# Altium PCB PCB1.PcbDoc
Units mm, origin at the board's own origin, x right, y up, seen from the top; angles counter-clockwise.
Board outline 50 x 50 mm, 4 copper layers (Top Layer, Top Ground, Bottom Ground, Bottom Layer), stack 0.603 mm thick; 86 components, 67 nets, 302 pads, 139 vias.
Unrouted connection lines stored in the file: 23.
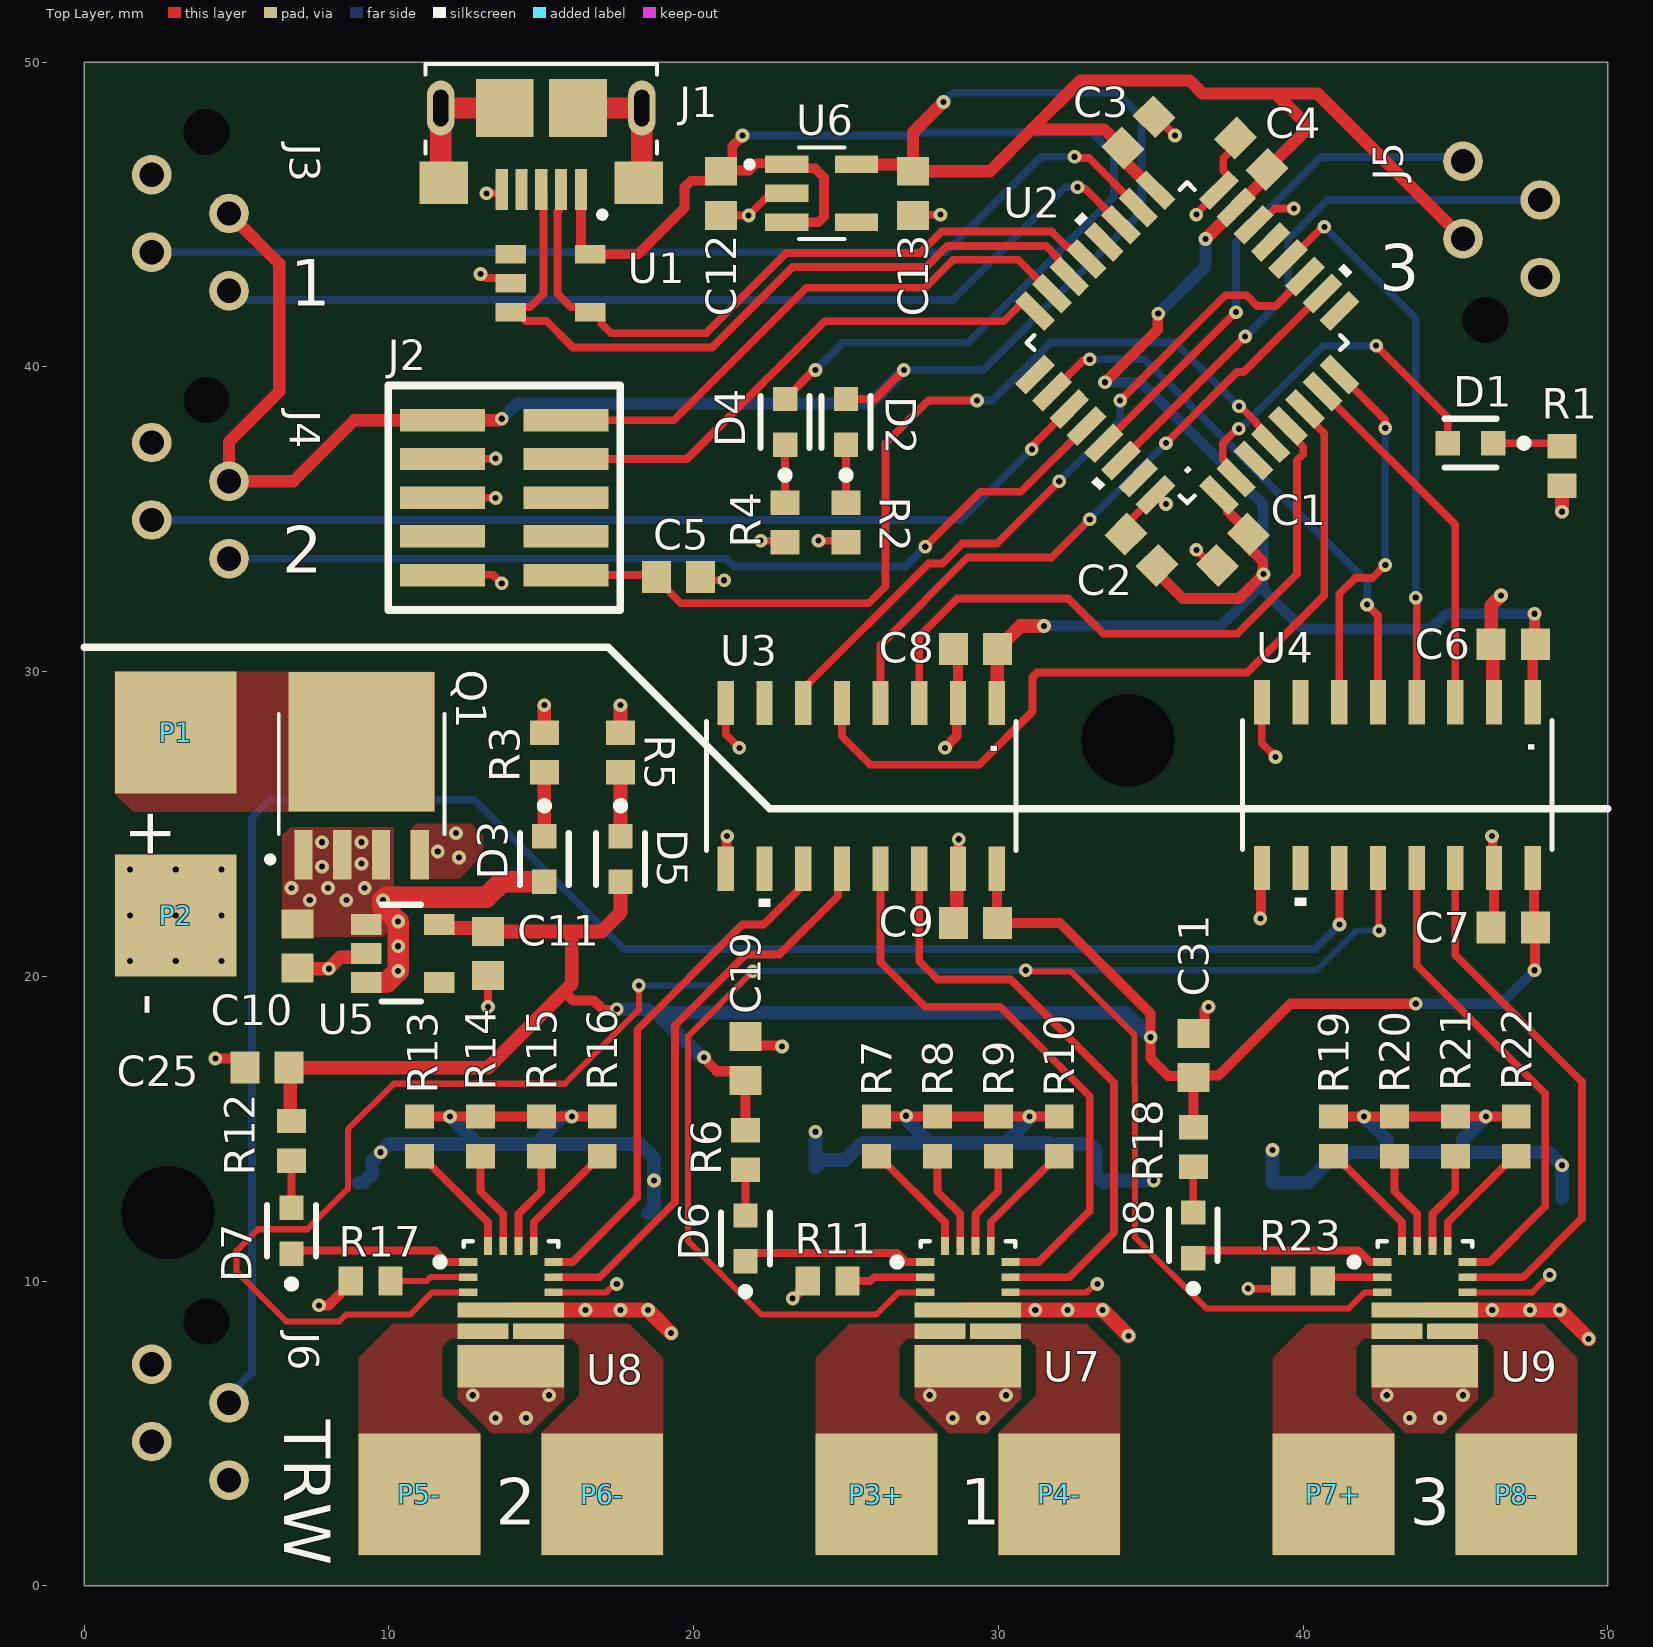
[diagram p0: Top Layer view]
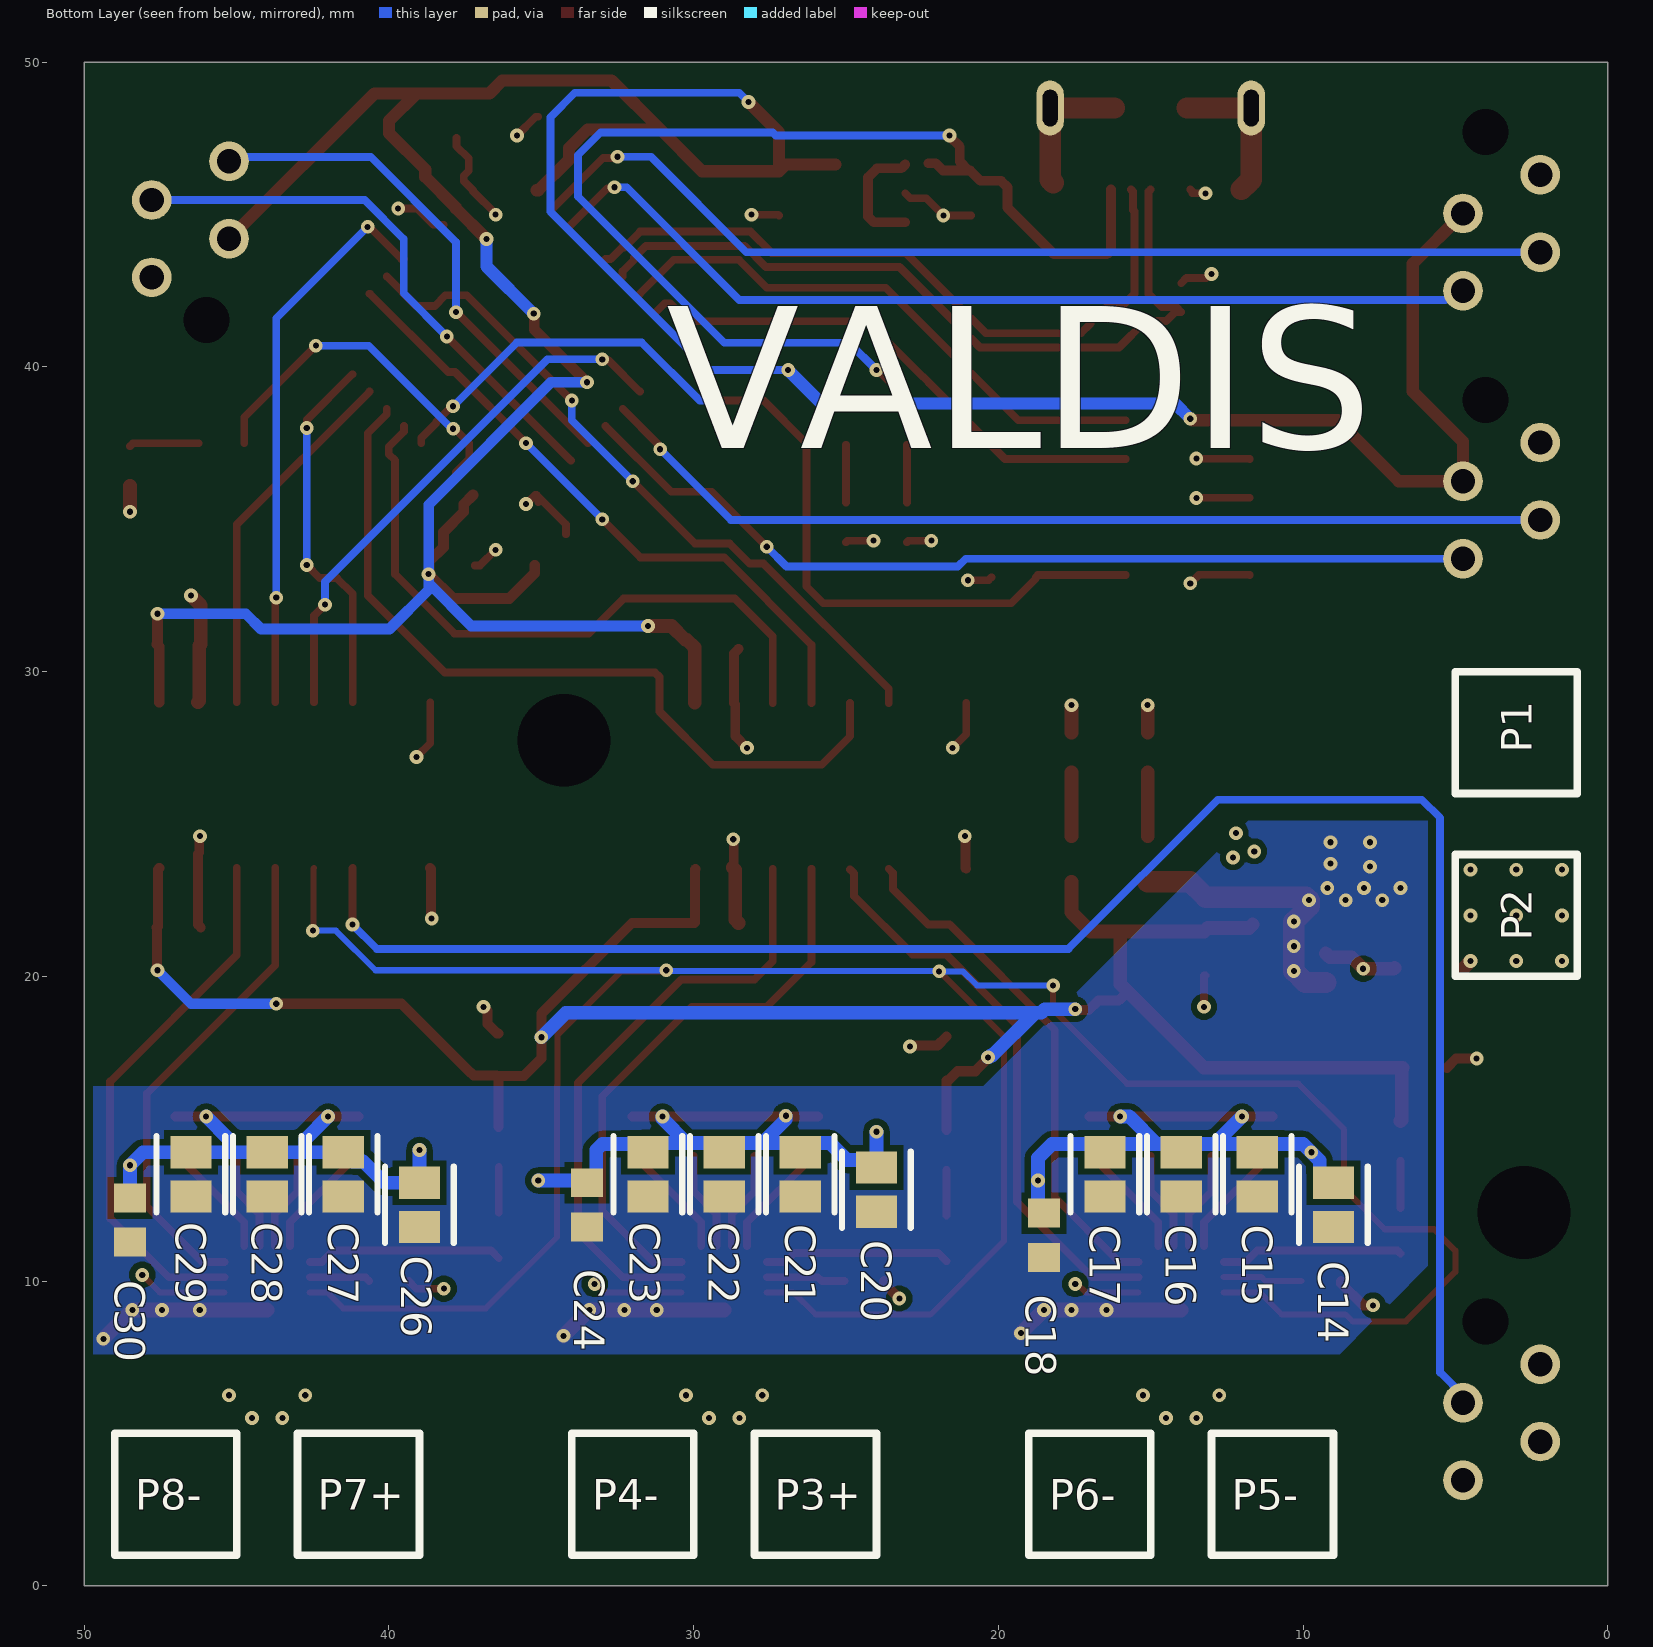
[diagram p1: Bottom Layer view, seen from below]
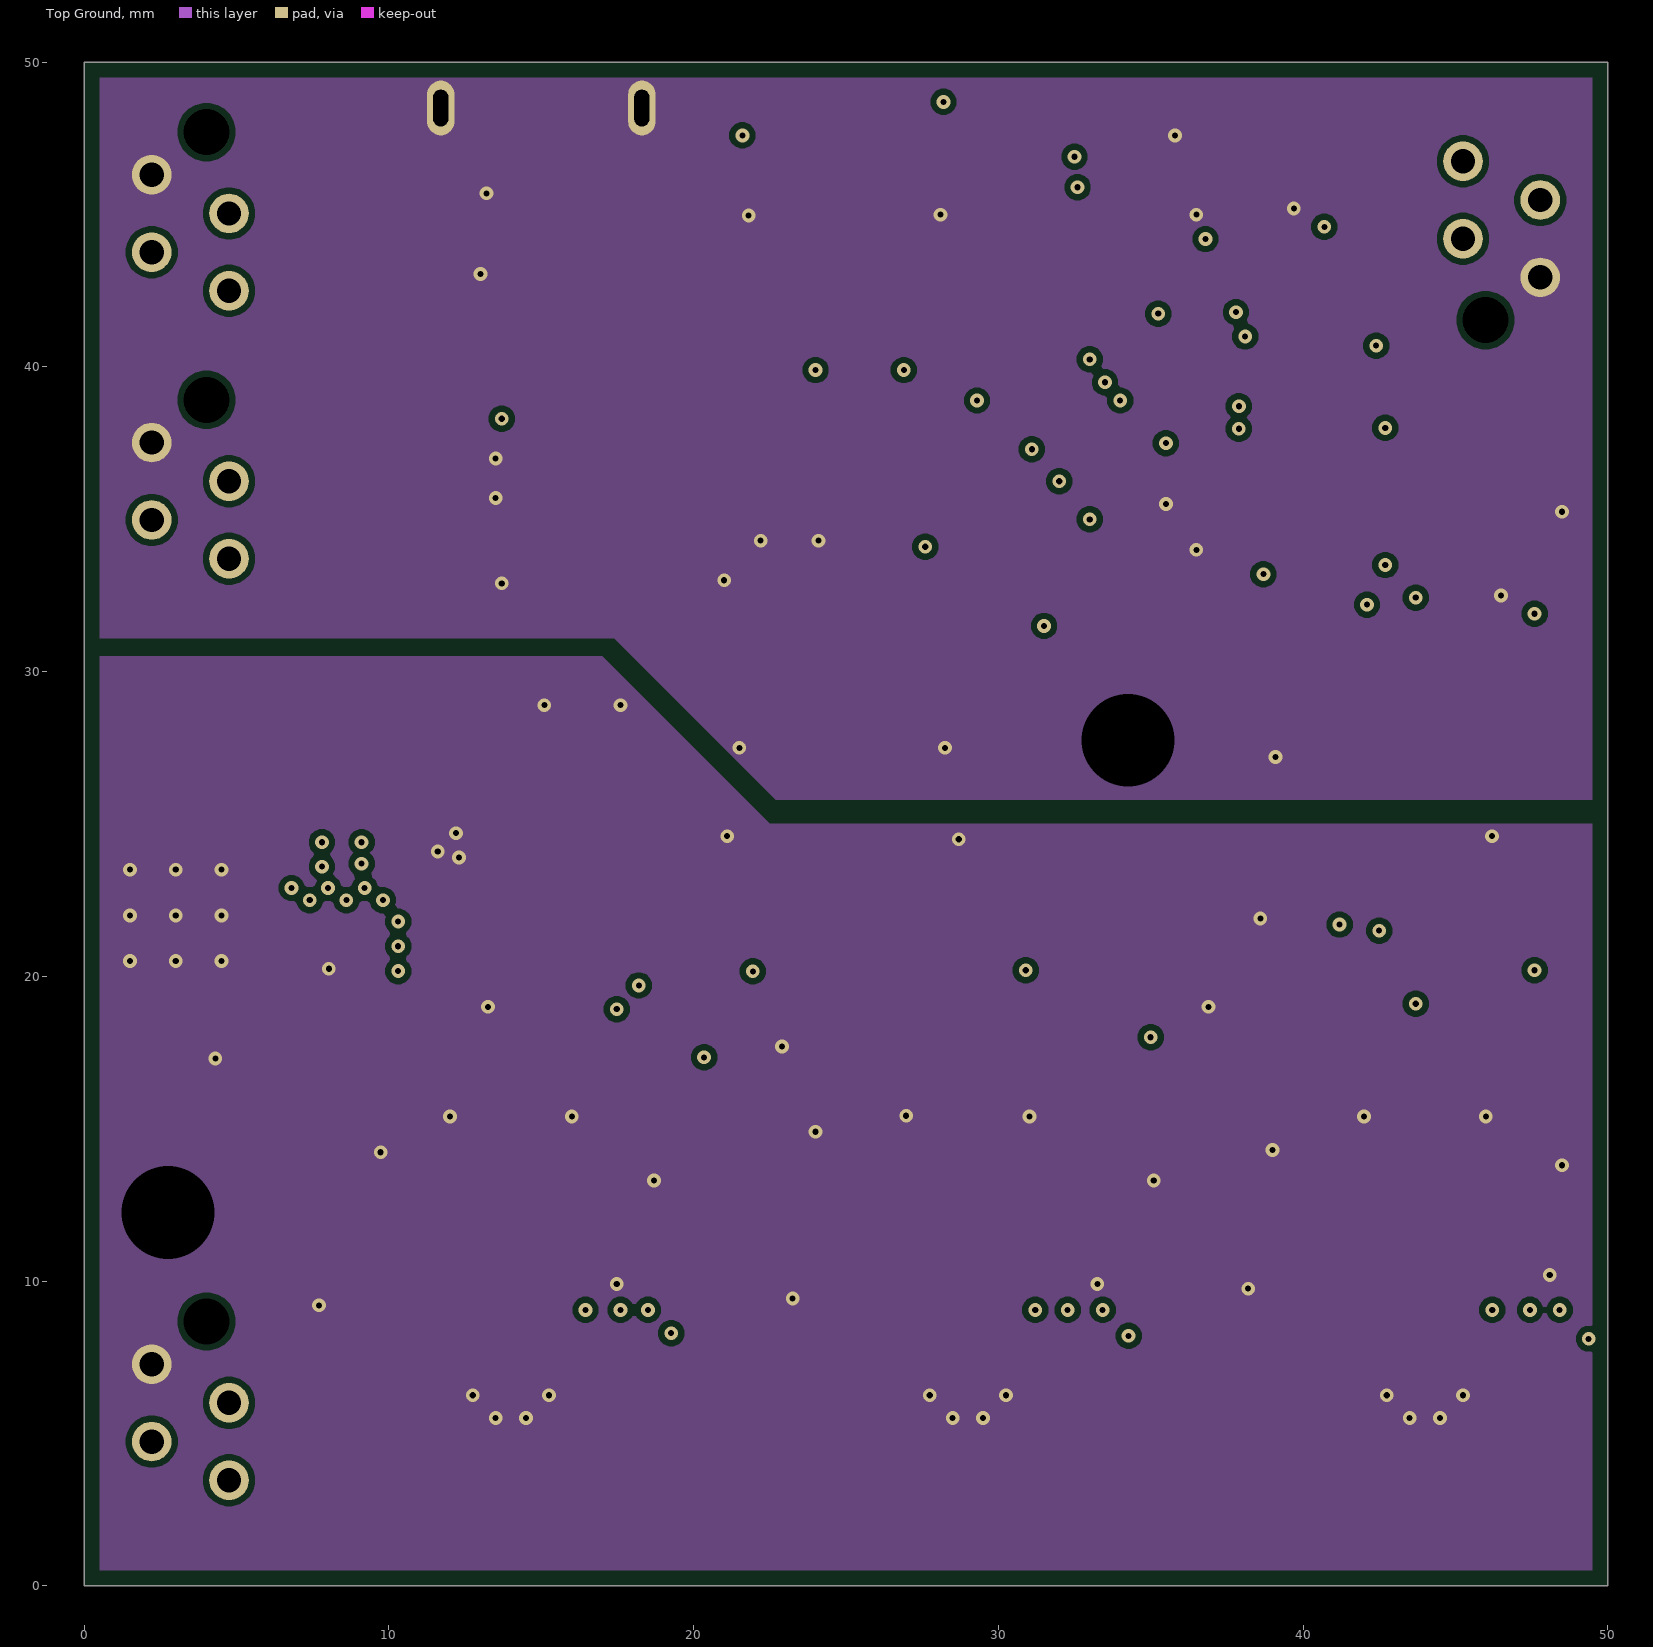
[diagram p2: Top Ground]
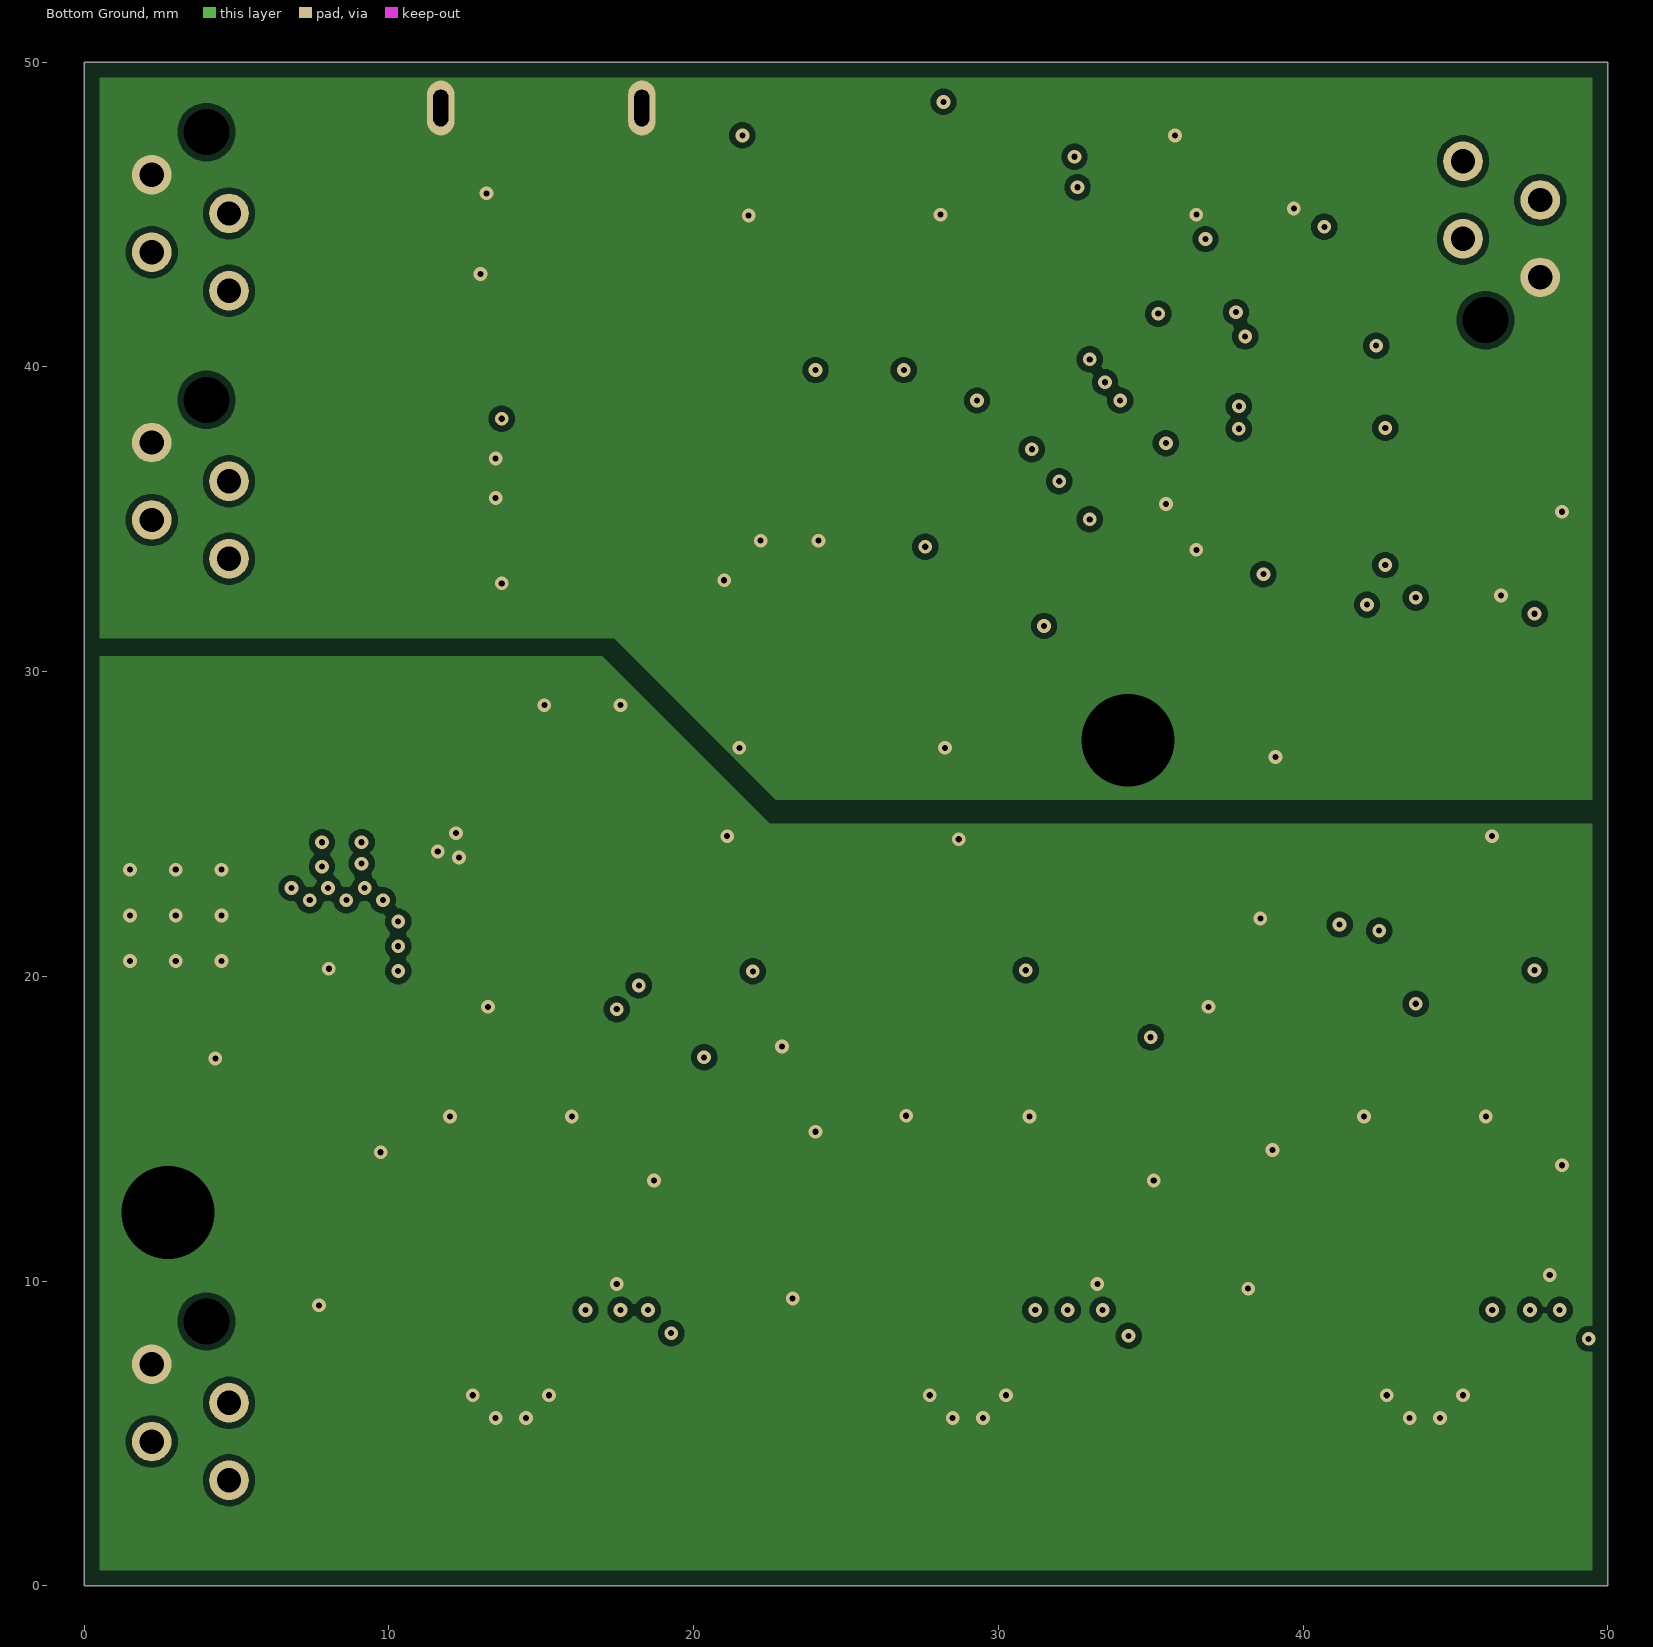
[diagram p3: Bottom Ground]
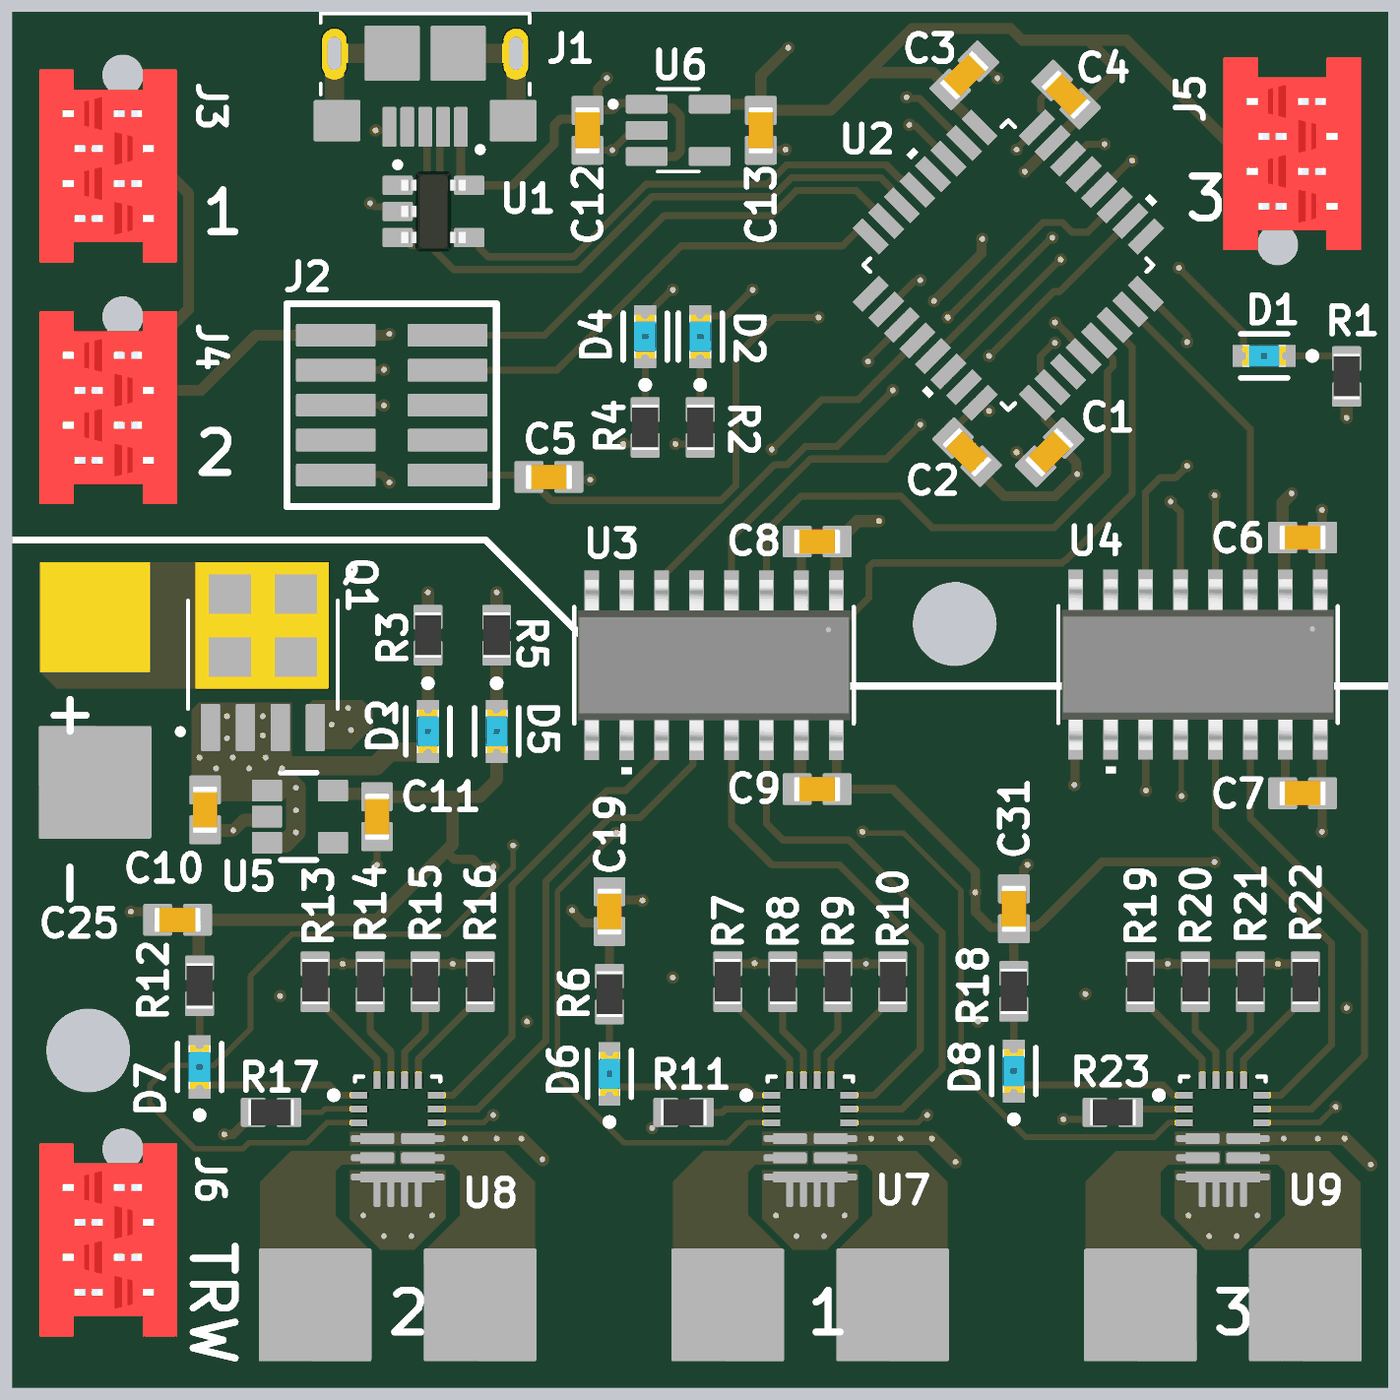
[diagram p4: 3D render of the assembled board from above, using the file's embedded part models]
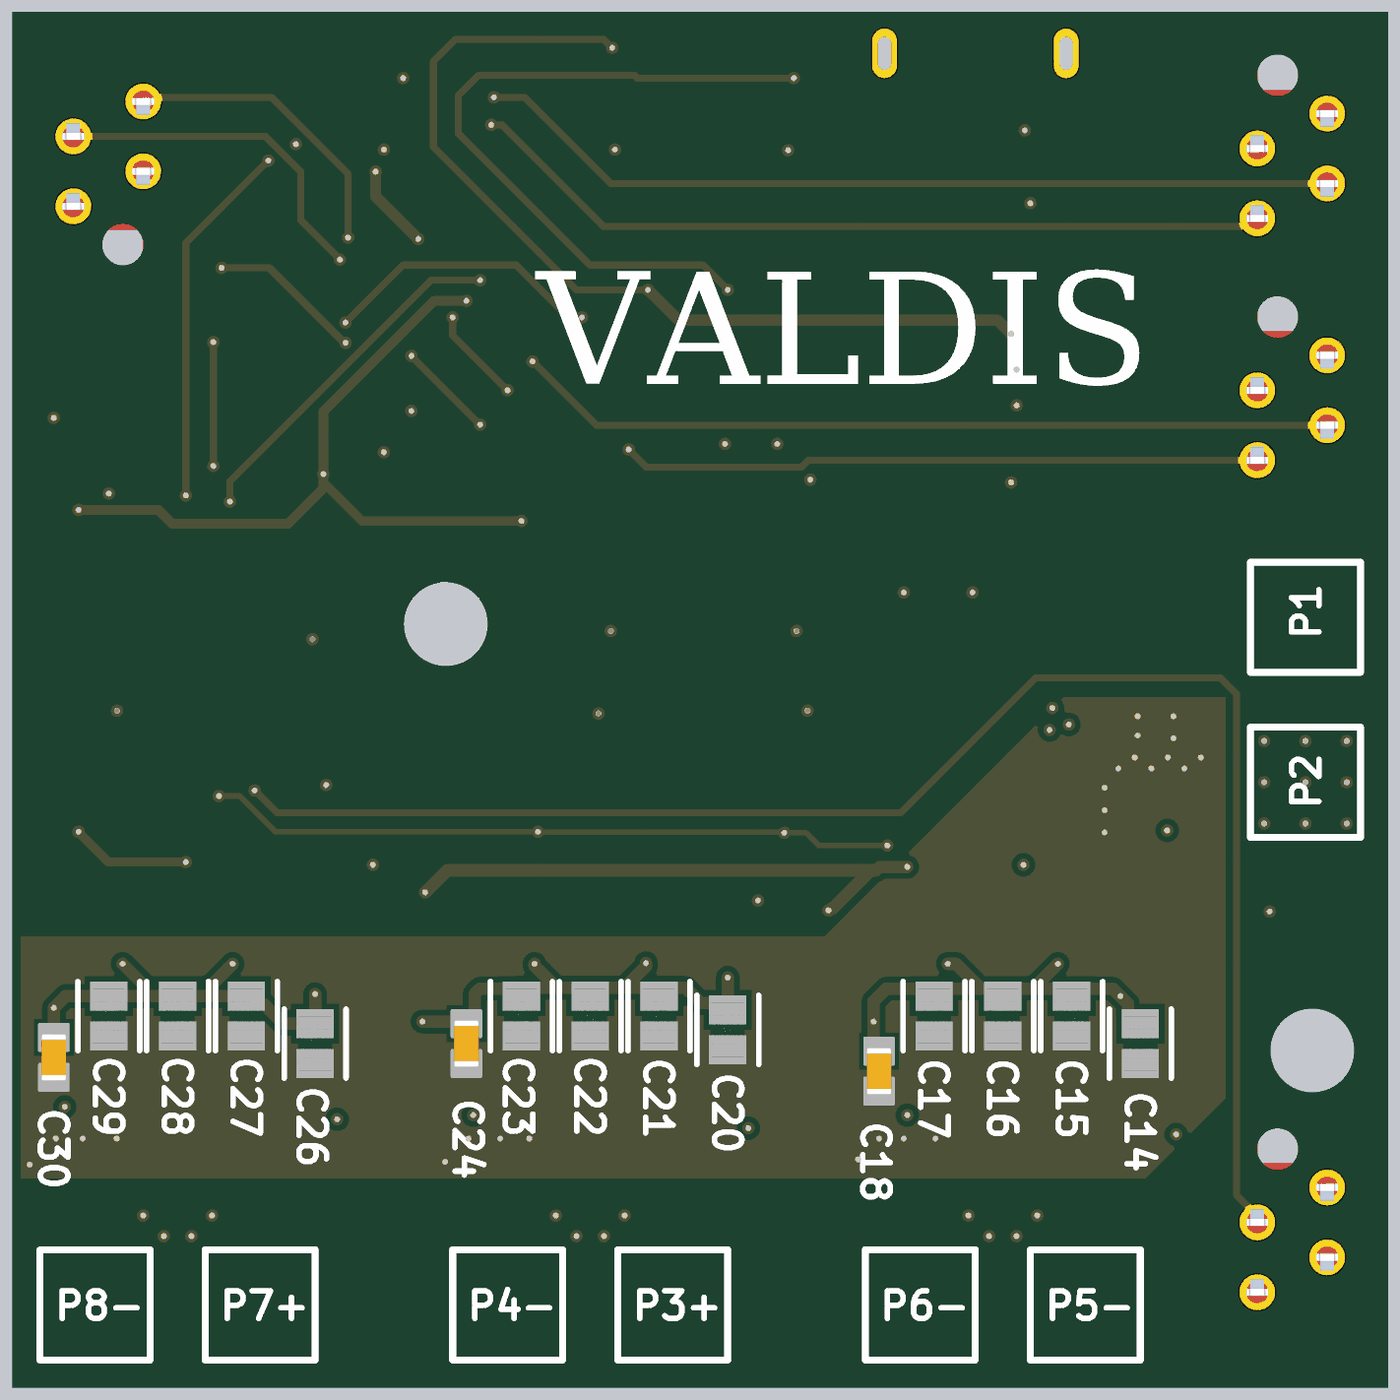
[diagram p5: 3D render of the assembled board from below, using the file's embedded part models]

## Layer stack, top to bottom
Top Solder: solder mask 0.0102, Solder Resist, Dk 3.5
Top Layer: signal copper 0.0356
Dielectric 2: prepreg 0.0711, PP-006, Dk 4.1
Top Ground: signal copper 0.035
Dielectric 1: dielectric 0.32, FR-4, Dk 4.8
Bottom Ground: signal copper 0.035
Dielectric 3: prepreg 0.0711, PP-006, Dk 4.1
Bottom Layer: signal copper 0.0356
Bottom Solder: solder mask 0.0102, Solder Resist, Dk 3.5

## Board outline
0,0 50,0 50,50 0,50

## Design rules (kind name [scope] priority, off if disabled: settings)
Clearance [All] p1: gap=0.2 ignorepadtopadclearanceinfootprint=TRUE
DiffPairsRouting "Schematic Differential Pairs Routing" [InDifferentialPairClass('USBA')] p1: maxlimit=0.203 minlimit=0.203 mostfreqgap=0.203 toplayer_minwidth=0.261 toplayer_maxwidth=0.261 toplayer_prefwidth=0.261 midlayer1_minwidth=0.261 midlayer1_maxwidth=0.261 midlayer1_prefwidth=0.261 midlayer2_minwidth=0.261 midlayer2_maxwidth=0.261 midlayer2_prefwidth=0.261 bottomlayer_minwidth=0.261 bottomlayer_maxwidth=0.261 bottomlayer_prefwidth=0.261 maxuncoupledlength=12.7
DiffPairsRouting [All] p2: maxlimit=0.254 minlimit=0.254 mostfreqgap=0.254 toplayer_minwidth=0.381 toplayer_maxwidth=0.381 toplayer_prefwidth=0.381 midlayer1_minwidth=0.381 midlayer1_maxwidth=0.381 midlayer1_prefwidth=0.381 midlayer2_minwidth=0.381 midlayer2_maxwidth=0.381 midlayer2_prefwidth=0.381 bottomlayer_minwidth=0.381 bottomlayer_maxwidth=0.381 bottomlayer_prefwidth=0.381 maxuncoupledlength=12.7
HoleSize [All] p1: absolutevalues=TRUE maxlimit=6.3 minlimit=0.025 maxpercent=80.000 minpercent=20.000
HoleToHoleClearance [All] p1: gap=0.5 allowstackedmicrovias=TRUE
MinimumSolderMaskSliver [All] p1: minsoldermaskwidth=0.15
PasteMaskExpansion [All] p1: expansion=0.05
PlaneClearance [All] p1: clearance=0.2
PlaneConnect [All] p1: planeconnectstyle=Direct reliefexpansion=0.508 reliefentries=4 reliefconductorwidth=0.254 reliefairgap=0.254
PolygonConnect [All] p1: connectstyle=Direct reliefconductorwidth=0.254 reliefentries=4 polygonreliefangle="90 Angle" airgapwidth=0.254
RoutingVias [All] p1: holewidth=0.2 width=0.45 viastyle="Through Hole" minholewidth=0.2 minwidth=0.45 maxholewidth=6.3 maxwidth=6.56
SilkToSilkClearance [All] p1: silktosilkclearance=0.15
SilkToSolderMaskClearance [IsPad] p1: minsilkscreentomaskgap=0.15 clearancetoexposedcopper=TRUE
SolderMaskExpansion [isVia] p1: expansion=0.05 istentingtop=TRUE useseparateexpansions=TRUE expansionbottom=0.05 istentingbottom=TRUE
SolderMaskExpansion SolderMaskExpansion_1 [All] p2: expansion=0.05 istentingtop=FALSE useseparateexpansions=TRUE expansionbottom=0.05 istentingbottom=FALSE
Width [All] p1: maxlimit=1 minlimit=0.09 preferedwidth=0.254
21 further rules are at their usual default settings.

## Classes and differential pairs
differential pair class USBA: USB
component class MCU_3: C26 C27 C28 C29 C30 C31 D8 R18 R19 R20 R21 R22 R23 U9
component class MCU_2: C20 C21 C22 C23 C24 C25 D7 R12 R13 R14 R15 R16 R17 U8
component class MCU_1: C14 C15 C16 C17 C18 C19 D6 R6 R7 R8 R9 R10 R11 U7
component class mainboard_valdis: C1 C2 C3 C4 C5 C6 C7 C8 C9 C10 C11 C12 C13 D1 D2 D3 D4 D5 J1 J2 J3 J4 J5 J6 P1 P2 P3+ P4- P5- P6- P7+ P8- Q1 R1 R2 R3 R4 R5 U1 U2 U3 U4 U5 U6
differential pair USB: +USB_P -USB_N

## Components (designator, comment, footprint, x,y, rotation, side; value= is the part's Value field where it differs from the comment)
C1 "4.7uF" CAPC1608X90X35ML10T15 37.7,34 r45 top locked
C2 "100nF" CAPC1608X90X35ML10T15 34.7,34 r315 top locked
C3 "100nF" CAPC1608X90X35ML10T15 34.6,47.7 r225 top locked
C4 "100nF" CAPC1608X90X35ML10T15 38.3,47 r315 top locked
C5 "100nF" CAPC1608X90X35ML10T15 19.5,33.1 r180 top locked
C6 "100nF" CAPC1608X90X35ML10T15 46.9,30.9 r0 top locked
C7 "100nF" CAPC1608X90X35ML10T15 46.9,21.6 r0 top locked
C8 "100nF" CAPC1608X90X35ML10T15 29.25,30.75 r0 top
C9 "100nF" CAPC1608X90X35ML10T15 29.25,21.75 r0 top
C10 "1uF" CAPC1608X90X35ML10T15 7,21 r90 top
C11 "1uF" CAPC1608X90X35ML10T15 13.25,20.75 r90 top
C12 "1uF" CAPC1608X90X35ML10T15 20.9,45.7 r90 top locked
C13 "1uF" CAPC1608X90X35ML10T15 27.2,45.7 r90 top locked
C14 "10uF" FP-CL21-IPC_C 9,12.5 r90 bottom
C15 "10uF" FP-CL21-IPC_C 11.5,13.5 r90 bottom
C16 "10uF" FP-CL21-IPC_C 14,13.5 r90 bottom
C17 "10uF" FP-CL21-IPC_C 16.5,13.5 r90 bottom
C18 "100nF" CAPC1608X90X35ML10T15 18.5,11.5 r270 bottom
C19 "100nF" CAPC1608X90X35ML10T15 21.7,17.3 r270 top locked
C20 "10uF" FP-CL21-IPC_C 24,13 r90 bottom
C21 "10uF" FP-CL21-IPC_C 26.5,13.5 r90 bottom
C22 "10uF" FP-CL21-IPC_C 29,13.5 r90 bottom
C23 "10uF" FP-CL21-IPC_C 31.5,13.5 r90 bottom
C24 "100nF" CAPC1608X90X35ML10T15 33.5,12.5 r270 bottom
C25 "100nF" CAPC1608X90X35ML10T15 6,17 r0 top
C26 "10uF" FP-CL21-IPC_C 39,12.5 r90 bottom
C27 "10uF" FP-CL21-IPC_C 41.5,13.5 r90 bottom
C28 "10uF" FP-CL21-IPC_C 44,13.5 r90 bottom
C29 "10uF" FP-CL21-IPC_C 46.5,13.5 r90 bottom
C30 "100nF" CAPC1608X90X35ML10T15 48.5,12 r270 bottom
C31 "100nF" CAPC1608X90X35ML10T15 36.4,17.4 r270 top locked
D1 "LTST-C191TBKT" FP-LTST-C191TBKT-MFG 45.5,37.5 r180 top locked
D2 "LTST-C191TBKT" FP-LTST-C191TBKT-MFG 25,38.2 r90 top locked
D3 "LTST-C191TBKT" FP-LTST-C191TBKT-MFG 15.1,23.85 r270 top locked
D4 "LTST-C191TBKT" FP-LTST-C191TBKT-MFG 23,38.2 r90 top locked
D5 "LTST-C191TBKT" FP-LTST-C191TBKT-MFG 17.6,23.85 r270 top locked
D6 "LTST-C191TBKT" FP-LTST-C191TBKT-MFG 21.7,11.4 r90 top locked
D7 "LTST-C191TBKT" FP-LTST-C191TBKT-MFG 6.8,11.65 r90 top locked
D8 "LTST-C191TBKT" FP-LTST-C191TBKT-MFG 36.4,11.5 r90 top locked
J1 "10118193-0001LF" FCI_10118193-0001LF 15,48.5 r180 top locked
J2 "FTSH-105-01-L-DV-K" FTSH-105-01-XXX-DV-K 13.782,35.71 r270 top locked
J3 "microMatch4" microMatch4#1 2.21,46.31 r90 top locked
J4 "microMatch4" microMatch4#1 2.21,37.52 r90 top locked
J5 "microMatch4" microMatch4#1 47.79,42.94 r270 top locked
J6 "microMatch4" microMatch4#2 2.21,7.27 r90 top locked
P1 "BAT+" PCBComponent_1#1 3,28 r90 top locked
P2 "BAT-" PCBComponent_1#2 3,22 r0 top locked
P3+ "M1+" PCBComponent_1#2 26,3 r0 top locked (schematic designator P3)
P4- "M1-" PCBComponent_1#2 32,3 r0 top locked (schematic designator P4)
P5- "M2+" PCBComponent_1#2 11,3 r0 top locked (schematic designator P5)
P6- "M2-" PCBComponent_1#2 17,3 r0 top locked (schematic designator P6)
P7+ "M3+" PCBComponent_1#2 41,3 r0 top locked (schematic designator P7)
P8- "M3-" PCBComponent_1#2 47,3 r0 top locked (schematic designator P8)
Q1 "BUK6Y10-30PX" TO127P600X120-5N 9.1,26.64 r0 top
R1 "1K" RESC1609X50X30NL8T20 48.5,36.75 r90 top locked
R2 "1K" RESC1609X50X30NL8T20 25,34.9 r90 top locked
R3 "1K" RESC1609X50X30NL8T20 15.1,27.35 r270 top
R4 "1K" RESC1609X50X30NL8T20 23,34.9 r90 top locked
R5 "1K" RESC1609X50X30NL8T20 17.6,27.35 r270 top
R6 "1K" RESC1609X50X30NL8T20 21.7,14.3 r90 top locked
R7 "0" RESC1609X50X30NL8T20 26,14.75 r270 top locked
R8 "47K" RESC1609X50X30NL8T20 28,14.75 r270 top locked
R9 "0" RESC1609X50X30NL8T20 30,14.75 r270 top locked
R10 "0" RESC1609X50X30NL8T20 32,14.75 r270 top locked
R11 "2K2" RESC1609X50X30NL8T20 24.4,10 r0 top locked
R12 "1K" RESC1609X50X30NL8T20 6.8,14.6 r90 top locked
R13 "0" RESC1609X50X30NL8T20 11,14.75 r270 top locked
R14 "47K" RESC1609X50X30NL8T20 13,14.75 r270 top locked
R15 "0" RESC1609X50X30NL8T20 15,14.75 r270 top locked
R16 "0" RESC1609X50X30NL8T20 17,14.75 r270 top locked
R17 "2K2" RESC1609X50X30NL8T20 9.4,10 r0 top locked
R18 "1K" RESC1609X50X30NL8T20 36.4,14.4 r90 top locked
R19 "0" RESC1609X50X30NL8T20 41,14.75 r270 top locked
R20 "47K" RESC1609X50X30NL8T20 43,14.75 r270 top locked
R21 "0" RESC1609X50X30NL8T20 45,14.75 r270 top locked
R22 "0" RESC1609X50X30NL8T20 47,14.75 r270 top locked
R23 "2K2" RESC1609X50X30NL8T20 40,10 r0 top locked
U1 "CM1223" SOT23-5 14,42.75 r270 top locked
U2 "STM32G441KBT3" LQFP32_7X7_STM 36.2,40.8 r135 top locked
U3 "MAX14930DASE+" 21-0041_S16+1_MXM 25.5,26.25 r270 top locked
U4 "MAX14930DASE+" 21-0041_S16+1_MXM 43.095,26.278 r270 top locked
U5 "NCV8730ASN500T1G" TSSOP5 10.45,20.75 r270 top
U6 "NCP164CSN330T1G" SOP95P275X110-5N 24.2,45.7 r0 top locked
U7 "PDRV8243HRXYQ1" RXY0014A-MFG 29,9 r0 top locked
U8 "PDRV8243HRXYQ1" RXY0014A-MFG 14,9 r0 top locked
U9 "PDRV8243HRXYQ1" RXY0014A-MFG 44,9 r0 top locked

## Footprints (in the part's own frame and the unit in brackets; to place one, negate y for a bottom-side part, rotate by r counter-clockwise, add the part's x,y. Pads: shape width x height; smd on the part's side, far side on the other; paste and mask are expansions set on the pad)
21-0041_S16+1_MXM [mm]
  rect 1.456x0.533 smd paste+0 mask+0: 1(-2.722,4.445) 2(-2.722,3.175) 3(-2.722,1.905) 4(-2.722,0.635) 5(-2.722,-0.635) 6(-2.722,-1.905) 7(-2.722,-3.175) 8(-2.722,-4.445) 9(2.722,-4.445) 10(2.722,-3.175) 11(2.722,-1.905) 12(2.722,-0.635) 13(2.722,0.635) 14(2.722,1.905) 15(2.722,3.175) 16(2.722,4.445)
  silkscreen extent -2.12,-5.08 3.96,5.08, body extent -3.1,-4.95 3.1,4.95, height 1.76
CAPC1608X90X35ML10T15 [mm] "Chip Capacitor, 2-Leads, Body 1.7x0.9mm, IPC Low Density"
  rect 0.95x1.05 smd: 1(-0.725,0) 2(0.725,0)
  body extent -0.85,-0.45 0.85,0.45, height 0.9
FCI_10118193-0001LF [mm]
  rect 0.4x1.35 smd: 1(-1.3,2.675) 2(-0.65,2.675) 3(0,2.675) 4(0.65,2.675) 5(1.3,2.675)
  rect 1.6x1.4 smd: S1(-3.2,2.45) S2(3.2,2.45)
  rect 1.9x1.9 smd: S3(1.2,0) S4(-1.2,0)
  oval 0.9x1.8 hole 0.5 slot 1.2 at 90 deg: S5(-3.3,0) S6(3.3,0)
  silkscreen extent -3.8,-1.45 3.8,3.6
FP-CL21-IPC_C [mm]
  rect 1.055x1.356 smd paste+0 mask+0: 1(-0.726,0) 2(0.726,0)
  silkscreen extent -1.25,-1.12 1.25,1.12, body extent -1,-0.63 1,0.63, height 1.45
FP-LTST-C191TBKT-MFG [mm]
  rect 0.8x0.8 smd paste+0 mask+0: 1(-0.75,0) 2(0.75,0)
  silkscreen extent -1.88,-0.8 0.85,0.8, body extent -1.25,-0.55 1.25,0.55, height 0.25
FTSH-105-01-XXX-DV-K [mil]
  rect 29x110 smd mask+2: 1(-100,-80) 2(-100,80) 3(-50,-80) 4(-50,80) 5(0,-80) 6(0,80) 7(50,-80) 8(50,80) 9(100,-80) 10(100,80)
  silkscreen extent -145,-150 145,150
LQFP32_7X7_STM [mm]
  rect 1.359x0.501 smd paste+0 mask+0: 1(-4.274,2.8) 2(-4.274,2) 3(-4.274,1.2) 4(-4.274,0.4) 5(-4.274,-0.4) 6(-4.274,-1.2) 7(-4.274,-2) 8(-4.274,-2.8) 17(4.274,-2.8) 18(4.274,-2) 19(4.274,-1.2) 20(4.274,-0.4) 21(4.274,0.4) 22(4.274,1.2) 23(4.274,2) 24(4.274,2.8)
  rect 0.501x1.359 smd paste+0 mask+0: 9(-2.8,-4.274) 10(-2,-4.274) 11(-1.2,-4.274) 12(-0.4,-4.274) 13(0.4,-4.274) 14(1.2,-4.274) 15(2,-4.274) 16(2.8,-4.274) 25(2.8,4.274) 26(2,4.274) 27(1.2,4.274) 28(0.4,4.274) 29(-0.4,4.274) 30(-1.2,4.274) 31(-2,4.274) 32(-2.8,4.274)
  silkscreen extent -3.72,-5.46 5.46,5.46, body extent 0,0 0.25,0.25, height 0.25
microMatch4#1 [mm]
  round 1.3 hole 0.8: 1(0,0) 2(-1.27,-2.54) 3(-2.54,0) 4(-3.81,-2.54)
  round 0 hole 1.5 unplated mask-1.5: drill(1.4,-1.8)
  body extent -5.41,-3.77 1.6,1.23, height 4
microMatch4#2 [mm]
  round 1.3 hole 0.8: 1(0,0) 2(-1.27,-2.54) 3(-2.54,0) 4(-3.81,-2.54)
  round 0 hole 1.5 unplated: drill(1.4,-1.8)
  body extent -5.41,-3.77 1.6,1.23, height 4
PCBComponent_1#1 [mm]
  rect 4x4 smd paste-2539.97 mask+0: 1(0,0)
PCBComponent_1#2 [mm]
  rect 4x4 smd mask+0: 1(0,0)
RESC1609X50X30NL8T20 [mm] "Chip Resistor, 2-Leads, Body 1.65x0.95mm, IPC Medium Density"
  rect 0.8x0.95 smd: 1(-0.65,0) 2(0.65,0)
  body extent -0.82,-0.48 0.82,0.48, height 0.5
RXY0014A-MFG [mm]
  rect 0.6x0.25 smd paste+0 mask-0.292: 1(-1.4,1.625) 2(-1.4,1.125) 3(-1.4,0.625) 8(1.4,0.625) 9(1.4,1.125) 10(1.4,1.625)
  rect 3.5x0.5 smd paste-1.737 mask-1.74: 4(0,0.05)
  rect 1.675x0.5 smd paste-0.825 mask-0.826: 5(-0.913,-0.65) 7(0.913,-0.65)
  rect 3.5x1.4 smd paste-1.737 mask-1.74: 6(0,-1.8)
  rect 0.25x0.6 smd paste+0 mask-0.292: 11(0.75,2.15) 12(0.25,2.15) 13(-0.25,2.15) 14(-0.75,2.15)
  silkscreen extent -2.45,1.5 1.55,2.3, body extent 0,0 0.25,0.25, height 0.25
SOP95P275X110-5N [mm]
  rect 1.42x0.58 smd: 1(-1.145,0.95) 2(-1.145,0) 3(-1.145,-0.95) 4(1.145,-0.95) 5(1.145,0.95)
  silkscreen extent -2.46,-1.5 0.75,1.5
SOT23-5 [mm] "SOT143-4 as used in SP0503BAHTG"
  round 0.4 on Top Overlay: 1(-1.7,0)
  rect 0.6x1 smd: 1(-0.95,0) 2(0,0) 3(0.95,0) 4(0.95,2.6) 5(-0.95,2.6)
  body extent -1.46,0.13 1.46,2.47, height 1
TO127P600X120-5N [mm]
  rect 0.6x1.62 smd: 1(-1.905,-2.65) 2(-0.635,-2.65) 3(0.635,-2.65) 4(1.905,-2.65)
  rect 4.8x4.58 smd paste-3: 5(0,1.06)
  silkscreen extent -3.1,-2.9 2.72,1.97
TSSOP5 [mm]
  rect 0.7x1 smd: 1(-0.95,-1.2) 2(0,-1.2) 3(0.95,-1.2) 4(0.95,1.2) 5(-0.95,1.2)
  silkscreen extent -1.6,-0.7 1.58,0.6

## Part data
C1 C2 C3 C4 C5 C6 C7 C8 C9 C10 C11 C12 C13 C18 C19 C24 C25 C30 C31: library part CMP-2000-04945-1, "Chip Capacitor, 22 pF, +/- 5%, 50 V, -55 to 125 degC, 0603 (1608 Metric), RoHS, Tape and Reel", Capacitance=22pF, Case Size/Dimension=0603, Dielectric=C0G, MANUFACTURER=Murata, Package Description="2-Pin Surface Mount Device, Body 1.6 x 0.8 mm", Package Reference=603, Rated Voltage=50V, Tolerance (%)=±5%, Datasheet URL=https://datasheet.ciiva.com/11786/0900766b807a1cab-11786398.pdf, Datasheet Version=Jul-06, Manufacturer URL=http://www.murata.com/
C14 C15 C16 C17 C20 C21 C22 C23 C26 C27 C28 C29: library part CMP-13271-003225-1, "CL21 Series 0805 22uF 25V ±20% Tolerance X5R Multilayer Ceramic Chip Capacitor"
D1 D2 D3 D4 D5 D6 D7 D8: library part CMP-22017-000008-1, "LED BLUE CLEAR CHIP SMD", Case Code (Imperial)=0603, Case Code (Metric)=1608, Color=Blue, Forward Current=20mA, Forward Voltage=3.8V, Lens Color=Colorless, Max Operating Temperature=80°C, Max Power Dissipation=75mW, Min Operating Temperature=-20°C, Package Quantity=1, Power Dissipation=76mW, Reverse Voltage=5V, Case/Package=0603, Depth=1.6mm, Dominant Wavelength=475nm, Height=0.55mm, Illumination Color=Blue, Lead Free="Lead Free", Length=0.8mm, Lens Style=Diffused, Lens Transparency=Clear, Luminous Intensity=180mcd, Mount="Surface Mount", Number of Elements=1, Number of LEDs=1, Number of Pins=2, Packaging="Tape and Reel", Radiation Hardening=No, Test Current=20mA, Viewing Angle=130°, Wavelength=468nm, Width=0.8mm
J1: "USB - micro B USB 2.0 Receptacle Connector 5 Position Surface Mount, Right Angle; Through Hole", Package=None, Availability=Unavailable, MF="Amphenol ICC", MP=10118193-0001LF, Price=None, SnapEDA_Link=https://www.snapeda.com/parts/10118193-0001LF/Amphenol%20FCI/view-part/2758989/?ref=snap
P1 P2 P3+ P4- P5- P6- P7+ P8-: library part Pad4x4
R1 R2 R3 R4 R5 R6 R7 R8 R9 R10 R11 R12 R13 R14 R15 R16 R17 R18 R19 R20 R21 R22 R23: library part CMP-2000-03816-5, "Chip Resistor, 0 Ohm, Jumper, 100 mW, -55 to 155 degC, 0603 (1608 Metric), RoHS, Tape and Reel", MANUFACTURER="Vishay Semiconductor", Max Operating Temperature="155 degC", Min Operating Temperature="-55 degC", Package Quantity=5000, Voltage Rating="75 V", ComponentLink1Description="Manufacturer URL", ComponentLink1URL=http://www.vishay.com/, ComponentLink2Description=Datasheet, ComponentLink2URL=http://www.vishay.com/docs/20035/dcrcwe3.pdf, DatasheetVersion=06/2012, Height="0.45 mm", Length="1.55 mm", Mount="Surface Mount", Mounting Technology="Surface Mount", PackageDescription="2-Pin Surface Mount Device, Body 1.575 x 0.85 mm", PackageReference=0603, Packaging="Tape and Reel", Pins=2, REACH SVHC=Unknown, RoHSCompliant=true
U2: "No Description Available", Built_By=EMA_Cory, Copyright="Copyright (C) 2018 Accelerated Designs. All rights reserved", Datasheet=https://www.st.com/resource/en/datasheet/stm32g441kb.pdf, Manufacturer_Part_Number=STM32G441KBT3, RefDes=RefDes, SourceLibrary=Add_to_database_2020-11-05, Type=DEV, Vendor=STMicroelectronics
U7 U8 U9: "No Description Available", Mfr_Name="Texas Instruments", Copyright="Copyright (C) 2022 Ultra Librarian. All rights reserved.", Manufacturer_Part_Number=PDRV8243HRXYQ1, RefDes=RefDes, Type=DEV

## Free pads (board coordinates)
  round 0 hole 3.048 unplated mask-3: HOLE(2.75,12.25) HOLE(34.25,27.75)

## Via types
v1: diameter 0.45, hole 0.2, Top Layer to Bottom Layer, tented both sides, 139 vias

## Nets (pads, with @x,y where several pads share a name; then routed paths per layer and width w, separated by ;. In a path a pad name is that pad's centre, name@x,y a point inside that pad or via, vN(x,y) a via of type N, cw(c..) or ccw(c..) an arc to the next point about the centre after c; other vN are vias at no path point)
+3.3V: C1.2 C2.2 C3.2 C4.2 C6.2 C8.2 C13.2 D2.2 J2.1 J3.2 J4.2 J5.2 U2.1 U2.15 U2.17 U3.1 U4.1 U6.5 | length 141.1
  Top Layer w0.254: D2.2 25.95,38.95 v1(26.9,39.9)
  Top Layer w0.35: U3.1 U3.1@29.96,28.987 ; C8.2@29.96,30.735 C8.2 ; v1(33.5,39.5) 35.231,41.231 v1@35.231,41.731 ; C2.2 35.213,33.236 36.049,32.4 37.9,32.4 v1(38.7,33.2) 38.681,33.219 38.681,33.62 38.213,34.088 38.213,34.577 37.545,35.244 37.545,35.495 U2.1 ; U4.1 47.54,30.815 C6.2 47.6,30.925 v1(47.6,31.9)
  Top Layer w0.4: J3.2 6.4,43.39 6.4,39.2 4.75,37.55 J4.2 6.857,36.25 8.857,38.25 13.636,38.25 13.686,38.3 v1(13.7,38.3) ; U6.5 26.975,46.65 C13.2 ; v1(28.2,48.7) 27.2,47.7 C13.2 ; U2.17 35.098,45.802 34.087,46.813 C3.2 33.475,47.8 31.1,47.8 ; v1(36.8,44.2) 37.808,45.208 U2.15 38.813,46.241 C4.2 40,47.675 40,48.08 39.1,48.98 ; J5.2 40.48,48.98 39.1,48.98 ; C13.2 29.725,46.425 31.1,47.8 ; 31.1,47.8 32.7,49.4 36.28,49.4 36.7,48.98 39.1,48.98
  Top Layer w0.45: U3.1@29.96,28.987 C8.2@29.96,30.735 ; C8.2 29.975,30.8 30.225,31.05 30.275,31.05 30.725,31.5 v1(31.5,31.5)
  Bottom Layer w0.254: v1(26.9,39.9) 29.5,39.9 34.7,45.1 34.7,48.2 33.9,49 28.5,49 v1(28.2,48.7)
  Bottom Layer w0.35: v1(31.5,31.5) 37.3,31.5 38.7,32.9 ; v1(33.5,39.5) 34.681,39.5 38.7,35.481 38.7,32.9 ; v1(47.6,31.9) 44.7,31.9 44.2,31.4 39.984,31.4 38.7,32.684 38.7,32.9
  Bottom Layer w0.4: v1(13.7,38.3) 14.2,38.8 25.8,38.8 v1(26.9,39.9) ; v1(35.25,41.75) 36.8,43.3 v1(36.8,44.2)
+5: C7.2 C9.2 C11.2 C19.2 C25.2 C31.2 D5.2 R6.2 R12.2 R18.2 U3.16 U4.16 U5.5 | length 75.5
  Top Layer w0.33: 15.75,19.5 16.05,19.2 16.722,19.2 17.022,18.9 17.454,18.9 v1(17.477,18.923) ; v1(20.342,17.342) 20.342,17.31 20.747,16.905 20.747,16.885 21.34,16.885 21.65,16.575 C19.2 R6.2 ; U3.16 29.96,23.513 29.96,21.765 C9.2 32.025,21.75 35,18.775 v1(35,18) 35,17.3 35.573,16.727 36.348,16.727 C31.2 ; R18.2 C31.2 ; v1(43.7,19.1) 39.591,19.1 37.341,16.85 37.325,16.85 37.227,16.752 36.477,16.752 C31.2 ; U4.16 47.582,23.514 47.582,21.643 C7.2 47.612,21.587 47.612,20.212 v1(47.6,20.2)
  Top Layer w0.45: R12.2 6.763,15.287 6.763,16.962 C25.2 13.25,17 15.75,19.5 16,19.75 16,21.475 ; U5.5 11.762,21.588 13.137,21.588 C11.2 16,21.475 ; D5.2 17.6,22.1 16.975,21.475 16,21.475
  Bottom Layer w0.33: v1(43.7,19.1) 46.5,19.1 v1(47.6,20.2)
  Bottom Layer w0.45: v1(17.477,18.923) 18.479,18.923 18.602,18.8 18.8,18.8 ; v1(20.342,17.342) 20.31,17.342 20.25,17.402 20.198,17.402 18.8,18.8 ; v1(35,18) 34.2,18.8 18.8,18.8
+5VA: C12.2 D4.2 J1.1 U1.5 U6.1 U6.3 | length 42.6
  Top Layer w0.254: D4.2 23.95,39.9 v1(24,39.9)
  Top Layer w0.32: J1.1 16.3,43.84 16.44,43.7 18.172,43.7 19.7,45.228 19.7,45.9 19.91,46.11 20.585,46.11 C12.2@20.925,46.45 ; v1(21.6,47.6) 21.6,47.565 21.265,47.23 21.265,46.74 20.975,46.45 C12.2@20.925,46.45 ; 22.3,46.69 22.055,46.69 21.815,46.45 21.057,46.45 C12.2@20.925,46.45 ; U6.3 24.088,44.75 24.275,44.937 24.275,46.225 23.98,46.52 23.185,46.52 U6.1
  Bottom Layer w0.254: v1(21.6,47.6) 27.302,47.6 27.402,47.7 33.051,47.7 33.8,46.951 33.8,45.6 29,40.8 24.9,40.8 v1(24,39.9)
+16V: C10.2 C14.1 C15.1 C16.1 C17.1 C18.2 C20.1 C21.1 C22.1 C23.1 C24.2 C26.1 C27.1 C28.1 C29.1 C30.2 D3.2 Q1.1 Q1.2 Q1.3 U5.1 U5.3 U7.4 U8.4 U9.4 | length 26.3
  Top Layer w0.49: U8.4 v1(16.45,9.05) v1(17.6,9.05) v1(18.5,9.05) v1(19.263,8.287) ; U7.4 v1(31.213,9.05) v1(32.275,9.05) v1(33.425,9.05) v1(34.275,8.2) ; U9.4 v1(46.213,9.05) v1(47.45,9.05) v1(48.425,9.05) v1(49.375,8.1)
  Top Layer w0.7: U5.3 9.928,19.8 v1(10.3,20.172) v1(10.3,20.986) v1(10.3,21.8) 9.8,22.3 v1(9.8,22.5) 9.9,22.6 13.2,22.6 13.7,23.1 D3.2
  other v1: 7.4,22.5 8.6,22.5 6.8,22.9 8,22.9 9.2,22.9 7.8,23.6 9.1,23.7 7.8,24.4 9.1,24.4
GND: C1.1 C2.1 C3.1 C4.1 C5.1 C6.1 C8.1 C12.1 C13.1 J1.5 J1.S1 J1.S2 J1.S3 J1.S4 J1.S5 J1.S6 J2.3 J2.5 J2.9 J3.1 J4.1 J5.1 pad.HOLE@34.25,27.75 R1.1 R2.1 R4.1 U1.2 U2.14 U2.16 U2.32 U3.2 U3.8 U4.2 U4.8 U6.2 | length 43.4
  Top Layer w0.254: J2.9 11.765,33.185 13.415,33.185 v1(13.7,32.9) ; J2.5 11.755,35.705 13.495,35.705 v1(13.5,35.7) ; J2.3 11.76,36.99 13.49,36.99 v1(13.5,37) ; v1(13,43.052) 13.053,43.052 13.182,42.923 13.827,42.923 U1.2 ; v1(13.2,45.7) 13.627,45.7 13.627,45.752 J1.5 ; C5.1 20.325,33 v1(21,33) ; C12.1 v1(21.806,44.975) 22.368,45.537 22.892,45.537 U6.2 ; U3.8 21.055,27.945 v1(21.5,27.5) ; v1(22.2,34.3) 22.95,34.3 R4.1 ; v1(24.1,34.3) 24.95,34.3 R2.1 ; C13.1 27.225,45 v1(28.1,45) ; C2.1 34.187,34.828 U2.32@35.105,35.745 ; U2.32@35.105,35.57 U2.32@35.105,35.745 ; C3.1 35.187,48.213 v1(35.8,47.6) ; v1(35.5,35.5) 35.202,35.798 U2.32 U2.32@35.105,35.745 ; v1(36.5,34) 37.013,33.487 C1.1 ; v1(36.5,45) 36.5,45.03 37.242,45.772 U2.16 37.545,46.105 37.545,46.28 37.383,46.442 37.383,46.846 37.787,47.251 C4.1 ; U2.14@38.199,44.67 U2.14 38.548,44.67 39.077,45.2 v1(39.7,45.2) ; U4.8 38.65,27.65 v1(39.1,27.2)
  Top Layer w0.32: v1(28.25,27.5) 28.634,27.884 28.634,28.931 U3.2 28.675,30.6 C8.1
  Top Layer w0.45: U4.2 46.229,29.041 46.229,30.846 C6.1 46.175,32.175 v1(46.5,32.5) ; v1(48.5,35.25) R1.1
  Top Layer w0.7: J1.S2@12.025,45.825 J1.S2 11.7,46.15 J1.S6 J1.S3 ; J1.S4 J1.S5 18.3,46.15 J1.S1
GNDB: C7.1 C9.1 C10.1 C11.1 C14.2 C15.2 C16.2 C17.2 C18.1 C19.1 C20.2 C21.2 C22.2 C23.2 C24.1 C25.1 C26.2 C27.2 C28.2 C29.2 C30.1 C31.1 J6.1 P2.1 pad.HOLE@2.75,12.25 Q1.4 R3.1 R5.1 R7.1 R8.1 R9.1 R10.1 R11.1 R13.1 R14.1 R15.1 R16.1 R17.1 R19.1 R20.1 R21.1 R22.1 R23.1 U3.9 U3.15 U4.9 U4.15 U5.2 U7.6 U7.8 U8.6 U8.8 U9.6 U9.8 | length 94.7
  Top Layer w0.2: U8.8 17.132,9.625 17.407,9.9 v1(17.475,9.9) ; U7.8 32.907,9.625 33.182,9.9 v1(33.25,9.9) ; U9.8 47.525,9.625 v1(48.1,10.2)
  Top Layer w0.254: C11.1@13.2,20.025 C11.1 v1(13.25,19) ; v1(38.2,9.75) 39.1,9.75 R23.1
  Top Layer w0.32: U3.9 21.078,23.551 21.078,24.577 v1(21.1,24.6) ; v1(28.7,24.5) 28.687,24.487 28.687,23.598 U3.15@28.716,23.569 ; C7.1 46.27,21.695 46.27,24.018 46.225,24.063 46.225,24.575 v1(46.2,24.6)
  Top Layer w0.33: v1(4.3,17.3) 4.975,17.3 C25.1 ; v1(7.7,9.2) 8.025,9.2 8.75,9.925 R17.1 ; R13.1 R14.1 R15.1 R16.1 ; C19.1 22.002,17.723 22.877,17.723 v1(22.9,17.7) ; v1(23.25,9.425) 23.75,9.925 R11.1 ; R7.1@25.925,15.4 R7.1 R8.1 R9.1 R10.1 ; C31.1 36.45,18.125 36.76,18.435 36.76,18.86 v1(36.9,19) ; v1(38.6,21.9) 38.623,21.923 38.623,23.529 U4.9 ; R19.1 v1(42,15.4) R20.1 R21.1 R22.1
  Top Layer w0.45: v1(4.5,20.5) P2.1@4.725,20.275 ; C10.1 7.025,20.25 v1(8.025,20.25) 8.4,20.625 9.125,20.625 U5.2 ; R3.1 v1(15.1,28.9) ; R5.1 v1(17.6,28.9) ; C9.1 28.634,21.859 28.634,23.487 U3.15 U3.15@28.716,23.569
  Bottom Layer w0.45: C14.2 9.151,13.226 9.453,13.528 9.453,13.953 10,14.5 12.9,14.5 ; v1(12,15.4) 12.9,14.5 ; v1(16,15.4) 15.7,15.4 14.8,14.5 ; C18.1 18.7,12.425 18.7,14.036 18.236,14.5 14.8,14.5 ; v1(24,14.9) C20.2 24.245,13.971 24.971,13.971 25.529,14.529 27.75,14.529 ; v1(26.975,15.425) 26.975,15.304 27.75,14.529 ; v1(31.025,15.4) 31.025,15.329 30.225,14.529 ; C23.2@31.726,14.151 31.726,14.5 31.698,14.528 30.785,14.528 30.783,14.529 30.225,14.529 ; C23.2@31.726,14.273 31.953,14.5 33,14.5 33.2,14.3 33.2,13.475 33.45,13.225 C24.1 33.575,13.3 v1(35.1,13.3) ; v1(39,14.3) C26.2 40.145,13.226 40.843,13.923 41.198,13.923 C27.2 42.75,14.226 ; v1(42,15.4) 42.75,14.65 42.75,14.226 ; v1(46,15.4) 45.25,14.65 45.25,14.226 ; C30.1 v1(48.5,13.8) 48.074,14.226 C29.2 45.25,14.226 ; 12.9,14.5 14.8,14.5 ; 27.75,14.529 30.225,14.529 ; 42.75,14.226 C28.2 45.25,14.226
  other v1: 13.5,5.5 14.5,5.5 28.5,5.5 29.5,5.5 43.5,5.5 44.5,5.5 12.75,6.25 15.25,6.25 27.75,6.25 30.25,6.25 42.75,6.25 45.25,6.25 18.7,13.3 9.727,14.227 1.5,20.5 3,20.5 1.5,22 3,22 4.5,22 1.5,23.5 3,23.5 4.5,23.5 12.3,23.9 11.6,24.1 12.2,24.7
M1_DIR_A: U2.10 U3.4 | length 21.2
  Top Layer w0.254: U3.4 26.135,30.885 29,33.75 31.75,33.75 v1(33,35) ; v1(35.5,37.5) 37.834,39.834 38.053,39.834 40.627,42.408 U2.10
  Bottom Layer w0.254: v1(33,35) v1(35.5,37.5)
M1_DIR_B: U3.13 U7.10 | length 18.8
  Top Layer w0.254: U3.13 26.135,20.465 27.6,19 30.058,19 33,16.058 33,12.3 31.325,10.625 U7.10
M1_ENC_A: J3.3 U2.18 | length 34.4
  Top Layer w0.254: v1(32.5,46.9) 32.538,46.862 32.966,46.862 U2.18
  Bottom Layer w0.254: J3.3 28.27,43.77 31.4,46.9 v1(32.5,46.9)
M1_ENC_B: J3.4 U2.19 | length 31.4
  Top Layer w0.254: v1(32.6,45.9) 32.638,45.862 32.835,45.862 U2.19
  Bottom Layer w0.254: J3.4 5.033,42.5 5.333,42.2 28.5,42.2 32.2,45.9 v1(32.6,45.9)
M1_PWM_A: U2.5 U3.3 | length 21.5
  Top Layer w0.254: U3.3 27.405,31.155 28.65,32.4 32.3,32.4 33.452,31.248 37.848,31.248 39.8,33.2 39.8,36.933 40.005,37.138 40.005,37.386 39.505,37.886 U2.5
M1_PWM_B: U3.14 U7.9 | length 20
  Top Layer w0.254: U3.14 27.405,20.495 28,19.9 30.4,19.9 33.8,16.5 33.8,11.6 32.325,10.125 U7.9
M2_DIR_A: U2.11 U3.6 | length 23.2
  Top Layer w0.254: U3.6 23.595,29.434 27.709,33.548 28.156,33.548 28.812,34.204 29.954,34.204 v1(32,36.25) ; v1(34,38.9) 37.452,42.352 38.148,42.352 38.5,42 39.097,42 U2.11
  Bottom Layer w0.254: v1(32,36.25) 34,38.25 v1(34,38.9)
M2_DIR_B: U3.11 U8.10 | length 17.1
  Top Layer w0.254: U8.10 16.025,10.625 18.148,12.748 18.148,18.248 21.6,21.7 22.3,21.7 23.456,22.856 23.456,23.389 U3.11
M2_ENC_A: J4.3 U2.27 | length 31.7
  Top Layer w0.254: v1(31.1,37.3) 31.138,37.338 31.138,37.435 U2.27
  Bottom Layer w0.254: J4.3 28.78,34.98 v1(31.1,37.3)
M2_ENC_B: J4.4 U2.28 | length 30.2
  Top Layer w0.254: v1(27.6,34.1) 29.404,35.904 30.738,35.904 U2.28
  Bottom Layer w0.254: J4.4 21.071,33.71 21.329,33.452 26.952,33.452 v1(27.6,34.1)
M2_PWM_A: U2.6 U3.5 | length 26.7
  Top Layer w0.254: U3.5 24.865,27.885 25.802,26.948 29.378,26.948 31.123,28.693 31.123,29.825 31.272,29.974 38.167,29.974 38.248,30.055 38.255,30.055 40.7,32.5 40.7,37.823 40.07,38.452 U2.6
M2_PWM_B: U3.12 U8.9 | length 18.8
  Top Layer w0.254: U8.9 16.919,10.125 19.39,12.596 19.39,18.39 21.715,20.715 22.815,20.715 24.734,22.634 24.734,23.375 U3.12@24.865,23.506
M3_DIR_A: U2.12 U4.4 | length 18.5
  Top Layer w0.254: U2.12 39.586,43.539 40.647,44.6 v1(40.7,44.6) ; v1(43.7,32.43) 43.73,32.4 U4.4
  Bottom Layer w0.254: v1(40.7,44.6) 43.7,41.6 v1(43.7,32.43)
M3_DIR_B: U4.13 U9.10 | length 16.2
  Top Layer w0.254: U4.13 43.73,20.37 47.948,16.152 47.948,12.448 46.125,10.625 U9.10
M3_ENC_A: J5.3 U2.30 | length 18.3
  Top Layer w0.254: U2.30 34.028,36.93 38.099,41 v1(38.1,41)
  Bottom Layer w0.254: v1(38.1,41) 39.518,42.418 39.518,44.199 40.799,45.48 J5.3
M3_ENC_B: J5.4 U2.29 | length 17.1
  Top Layer w0.254: U2.29 33.478,37.495 37.783,41.8 v1(37.8,41.8)
  Bottom Layer w0.254: v1(37.8,41.8) 37.8,44.1 40.595,46.895 45.105,46.895 J5.4
M3_PWM_A: U2.7 U4.3 | length 12
  Top Layer w0.254: U2.7 45,34.828 U4.3
M3_PWM_B: U4.14 U9.9 | length 17.8
  Top Layer w0.254: U4.14 45,20.7 49.154,16.546 49.154,12.054 47.225,10.125 U9.9
NetD1_1: D1.1 R1.2 | length 2.3
  Top Layer w0.254: D1.1 48.4,37.5 R1.2
NetD1_2: D1.2 U2.2 | length 11.9
  Top Layer w0.254: U2.2 37.808,36.538 37.367,36.979 37.367,37.5 37.841,37.974 v1(37.894,37.974) ; v1(42.4,40.7) 44.75,38.35 D1.2
  Bottom Layer w0.254: v1(37.894,37.974) 37.939,37.974 40.664,40.7 v1(42.4,40.7)
NetD2_1: D2.1 R2.2 | length 1.9
  Top Layer w0.254: R2.2 D2.1
NetD3_1: D3.1 R3.2 | length 2.1
  Top Layer w0.45: D3.1 R3.2
NetD4_1: D4.1 R4.2 | length 1.9
  Top Layer w0.254: R4.2 D4.1
NetD5_1: D5.1 R5.2 | length 2.1
  Top Layer w0.45: D5.1 R5.2
NetD6_1: D6.1 U7.1 | length 6.1
  Top Layer w0.254: D6.1 21.973,10.923 26.677,10.923 26.975,10.625 U7.1
NetD6_2: D6.2 R6.1 | length 1.5
  Top Layer w0.254: D6.2 R6.1
NetD7_1: D7.1 U8.1 | length 6
  Top Layer w0.254: D7.1 6.9,11 11.5,11 11.875,10.625 U8.1
NetD7_2: D7.2 R12.1 | length 1.5
  Top Layer w0.254: D7.2 R12.1
NetD8_1: D8.1 U9.1 | length 6.5
  Top Layer w0.254: D8.1 36.65,11 41.825,11 42.198,10.627 42.598,10.627 U9.1
NetD8_2: D8.2 R18.1 | length 1.5
  Top Layer w0.254: D8.2 R18.1
NetP1_1: P1.1 Q1.5
NetP3_1: P3+.1 U7.5
NetP4_1: P4-.1 U7.7
NetP5_1: P5-.1 U8.5
NetP6_1: P6-.1 U8.7
NetP7_1: P7+.1 U9.5
NetP8_1: P8-.1 U9.7
NetR7_2: R7.2 U7.14 | length 3.9
  Top Layer w0.254: R7.2 26.075,14.1 28.25,11.925 U7.14
NetR8_2: R8.2 U7.13 | length 3.3
  Top Layer w0.254: R8.2 28,12.95 28.75,12.2 U7.13
NetR9_2: R9.2 U7.12 | length 3.3
  Top Layer w0.254: U7.12 29.25,12.199 30,12.949 R9.2
NetR10_2: R10.2 U7.11 | length 3.9
  Top Layer w0.254: U7.11 29.75,11.925 31.925,14.1 R10.2
NetR11_2: R11.2 U7.2 | length 2.6
  Top Layer w0.254: R11.2 25.8,10 25.925,10.125 U7.2
NetR13_2: R13.2 U8.14 | length 3.9
  Top Layer w0.254: R13.2 11.075,14.1 13.25,11.925 U8.14
NetR14_2: R14.2 U8.13 | length 3.3
  Top Layer w0.254: R14.2 13,12.949 13.75,12.199 U8.13
NetR15_2: R15.2 U8.12 | length 3.3
  Top Layer w0.254: U8.12 14.25,12.199 15,12.949 R15.2
NetR16_2: R16.2 U8.11 | length 3.9
  Top Layer w0.254: U8.11 14.75,11.925 16.925,14.1 R16.2
NetR17_2: R17.2 U8.2 | length 2.6
  Top Layer w0.2: R17.2 11.234,10 11.359,10.125 U8.2
NetR19_2: R19.2 U9.14 | length 3.9
  Top Layer w0.254: R19.2 41.075,14.1 43.25,11.925 U9.14
NetR20_2: R20.2 U9.13 | length 3.3
  Top Layer w0.254: R20.2 43,12.949 43.75,12.199 U9.13
NetR21_2: R21.2 U9.12 | length 3.3
  Top Layer w0.254: U9.12 44.25,12.199 45,12.949 R21.2
NetR22_2: R22.2 U9.11 | length 3.9
  Top Layer w0.254: U9.11 44.75,11.925 46.925,14.1 R22.2
NetR23_2: R23.2 U9.2 | length 2
  Top Layer w0.254: R23.2 40.775,10.125 U9.2
NRST: C5.2 J2.10 U2.4 | length 31.3
  Top Layer w0.254: J2.10 18.705,33.17 C5.2 18.775,33.05 19.577,32.248 25.748,32.248 26.3,32.8 26.3,37.5 27.7,38.9 v1(29.3,38.9) ; v1(37.896,38.712) 37.937,38.712 38.446,38.203 38.446,38.162 38.939,37.67 U2.4
  Bottom Layer w0.254: v1(29.3,38.9) 29.8,38.9 31.702,40.802 35.807,40.802 v1(37.896,38.712)
SLEEP_n: U2.26 U4.5 | length 17.9
  Top Layer w0.254: U2.26 32.784,40.212 32.962,40.212 v1(33,40.25) ; v1(42.1,32.2) 42.46,31.84 U4.5
  Bottom Layer w0.254: v1(33,40.25) 34.798,40.25 42.1,32.948 v1(42.1,32.2)
SLEEP_nB: U4.12 U7.3 U8.3 U9.3 | length 94
  Top Layer w0.2: U8.3 11.425,9.625 10.7,8.9 8.6,8.9 8.375,8.675 6.625,8.675 5,10.3 5,11 5.7,11.7 7.324,11.7 8.653,13.029 8.653,14.978 10.15,16.475 15.771,16.475 18.2,18.904 v1(18.2,19.7) ; v1(21.944,20.163) 19.817,18.037 19.817,11.308 22.226,8.9 26,8.9 26.725,9.625 U7.3 ; v1(30.9,20.2) 30.948,20.152 32.39,20.152 34.475,18.067 34.475,16.429 34.481,16.423 34.481,11.445 36.826,9.1 41.5,9.1 42.025,9.625 U9.3 ; U4.12 42.48,23.536 42.48,21.52 v1(42.5,21.5)
  Bottom Layer w0.2: v1(18.2,19.7) 20.7,19.7 21.163,20.163 v1(21.944,20.163) ; v1@22,20.2 22.019,20.181 30.881,20.181 v1(30.9,20.2) 40.442,20.2 41.742,21.5 v1(42.5,21.5)
SWCLK: J2.4 U2.24 | length 17.6
  Top Layer w0.254: J2.4 19.78,36.98 22.273,39.473 22.273,39.485 22.465,39.677 22.477,39.677 24.3,41.5 30.177,41.5 30.771,42.094 30.946,42.094 U2.24
SWDIO: J2.2 U2.23 | length 18.6
  Top Layer w0.254: J2.2 19.35,38.25 23.7,42.6 27.596,42.6 28.515,43.519 30.653,43.519 U2.23
TRW_PWM: U2.8 U4.6 | length 12.3
  Top Layer w0.254: U4.6 41.19,32.552 41.71,33.072 42.272,33.072 v1(42.7,33.5) ; U2.8 42.7,38.26 v1(42.7,38)
  Bottom Layer w0.254: v1(42.7,33.5) v1(42.7,38)
TRW_PWM_B: J6.2 U4.11 | length 59.7
  Top Layer w0.254: U4.11 41.195,23.551 41.195,21.705 v1(41.2,21.7)
  Bottom Layer w0.254: J6.2 4.75,6.25 5.5,7 5.5,25.2 6.1,25.8 12.8,25.8 17.7,20.9 40.4,20.9 v1(41.2,21.7)
USB_N: J1.2 U1.4 U2.21 | length 23.2
  Top Layer w0.261: J1.2 15.581,45.756 15.581,45.151 15.531,45.101 15.531,42.405 15.966,41.969 16.431,41.969 U1.4 16.8,41.8 16.969,41.631 16.969,41.431 17.292,41.108 20.408,41.108 23.048,43.748 27.441,43.748 28.133,44.441 31.756,44.441 32.28,43.917 32.348,43.917 32.726,43.539 U2.21
USB_P: J1.3 U1.3 U2.22 | length 25.5
  Top Layer w0.261: J1.3 15.066,45.759 15.066,42.403 14.633,41.969 14.169,41.969 U1.3 14.2,41.8 14.495,41.505 15.177,41.505 16.038,40.644 20.601,40.644 23.241,43.284 27.633,43.284 28.326,43.976 31.564,43.976 31.952,43.588 31.952,43.52 32.33,43.143 U2.22
pads on no net: J1.4 J2.6 J2.7 J2.8 J3.drill J4.drill J5.drill J6.3 J6.4 J6.drill U1.1 U2.3 U2.9 U2.13 U2.20 U2.25 U2.31 U3.7 U3.10 U4.7 U4.10 U5.4 U6.4

## Polygon pours and split planes (outlines as drawn)
GNDB on Top Layer "GNDB_L01_P046" (solid, remove dead copper, pour order 46): 10.7,24.8 10.9,25 12.7,25 13.1,24.6 13.1,24 12.3,23.2 10.7,23.2
+16V on Top Layer "+16V_L01_P040" (solid, remove dead copper, pour order 40): 6.5,24.625 6.775,24.9 10.15,24.9 10.15,21.65 9.8,21.3 6.5,21.3
NetP1_1 on Top Layer "NETP1_1_L01_P038" (solid, remove dead copper, pour order 38): 1,26 1.6,25.4 11.5,25.4 11.5,30 1,30
NetP6_1 on Top Layer "NETP6_1_L01_P021" (solid, remove dead copper, pour order 21): 15.001,1.002 19.001,1.002 19.001,7.477 17.876,8.602 14.076,8.602 14.076,8.102 16.001,8.102 16.251,7.852 16.251,6.252 15.001,5.002
NetP8_1 on Top Layer "NETP8_1_L01_P020" (solid, remove dead copper, pour order 20): 45.004,0.997 49.004,0.997 49.004,7.472 47.879,8.597 44.079,8.597 44.079,8.097 46.004,8.097 46.254,7.847 46.254,6.247 45.004,4.997
NetP4_1 on Top Layer "NETP4_1_L01_P019" (solid, remove dead copper, pour order 19): 30,1 34,1 34,7.475 32.875,8.6 29.075,8.6 29.075,8.1 31,8.1 31.25,7.85 31.25,6.25 30,5
NetP7_1 on Top Layer "NETP7_1_L01_P018" (solid, remove dead copper, pour order 18): 43,1 39,1 39,7.475 40.125,8.6 43.925,8.6 43.925,8.1 42,8.1 41.75,7.85 41.75,6.25 43,5
GNDB on Top Layer "GNDB_L01_P015" (solid, remove dead copper, pour order 15): 42.25,7.904 45.75,7.904 45.75,6.129 44.625,5.004 43.375,5.004 42.25,6.129
NetP3_1 on Top Layer "NETP3_1_L01_P017" (solid, remove dead copper, pour order 17): 28,1 24,1 24,7.475 25.125,8.6 28.925,8.6 28.925,8.1 27,8.1 26.75,7.85 26.75,6.25 28,5
NetP5_1 on Top Layer "NETP5_1_L01_P016" (solid, remove dead copper, pour order 16): 13,1 9,1 9,7.475 10.125,8.6 13.925,8.6 13.925,8.1 12,8.1 11.75,7.85 11.75,6.25 13,5
GNDB on Top Layer "GNDB_L01_P014" (solid, remove dead copper, pour order 14): 27.25,7.904 30.75,7.904 30.75,6.129 29.625,5.004 28.375,5.004 27.25,6.129
GNDB on Top Layer "GNDB_L01_P013" (solid, remove dead copper, pour order 13): 12.25,7.9 15.75,7.9 15.75,6.125 14.625,5 13.375,5 12.25,6.125
GND on Top Ground "GND_L02_P035" (solid, remove dead copper, pour order 35): 0.5,31.1 0.5,49.5 49.5,49.5 49.5,25.8 22.7,25.8 17.4,31.1
GNDB on Top Ground "GNDB_L02_P044" (solid, remove dead copper, pour order 44): 0.5,30.5 17,30.5 22.5,25 49.5,25 49.5,0.5 0.5,0.5
GND on Bottom Ground "GND_L03_P045" (solid, remove dead copper, pour order 45): 0.5,31.1 0.5,49.5 49.5,49.5 49.5,25.8 22.7,25.8 17.4,31.1
GNDB on Bottom Ground "GNDB_L03_P043" (solid, remove dead copper, pour order 43): 0.5,30.5 17,30.5 22.5,25 49.5,25 49.5,0.5 0.5,0.5
+16V on Bottom Layer "+16V_L04_P042" (solid, remove dead copper, pour order 42): 49.7,7.6 8.8,7.6 5.9,10.5 5.9,25.1 11.8,25.1 20.5,16.4 49.7,16.4

## Silkscreen, mask and mechanical layers (free items; w line width, h text height)
Top Overlay:
  lines w0.254: 0,30.8 17.2,30.8 22.5,25.5 50,25.5
  text "3" at 42.504,42.504 h1.52
  text "1" at 6.754,42.004 h1.52
  text "2" at 6.504,33.254 h1.52
  text "+" at 1.5,25.546 h1.52 r270
  text "-" at 1.492,19.446 h1.52 r270
  text "TRW" at 6.554,5.446 h1.52 r270
  text "2" at 13.504,2.004 h1.52
  text "1" at 28.754,2.004 h1.52
  text "3" at 43.504,2.004 h1.52
Bottom Overlay:
  lines w0.254: 1,20 1,24 5,24 5,20 1,20 ; 1,26 1,30 5,30 5,26 1,26 ; 9,1 9,5 13,5 13,1 9,1 ; 15,1 19,1 19,5 15,5 15,1 ; 24,1 28,1 28,5 24,5 24,1 ; 30,1 34,1 34,5 30,5 30,1 ; 39,1 43,1 43,5 39,5 39,1 ; 45,1 49,1 49,5 45,5 45,1
  text "VALDIS" at 30.9,35.8 h8
Mechanical 1:
  lines w0.4: 0,25.25 0,35 ; 0,0 0,50 50,50 50,0 0,0

## Text inside footprints (layer, text, board x,y; h text height)
J1: Mechanical 13 "PCB END" at 10.25,49.8 h0.41 r180
U2: Mechanical 13 "*" at 36.883,36.49 h1.27 r135
U3: Mechanical 13 "*" at 29.107,28.18 h1.27 r270
U4: Mechanical 13 "*" at 46.702,28.208 h1.27 r270